# Altium PCB PowerSupply2.PCBDOC
Units mm, origin at the board's own origin, x right, y up, seen from the top; angles counter-clockwise.
Board outline 72.77 x 23.11 mm, 2 copper layers (Top Layer, Bottom Layer); 7 components, 4 nets, 22 pads, 2 vias.
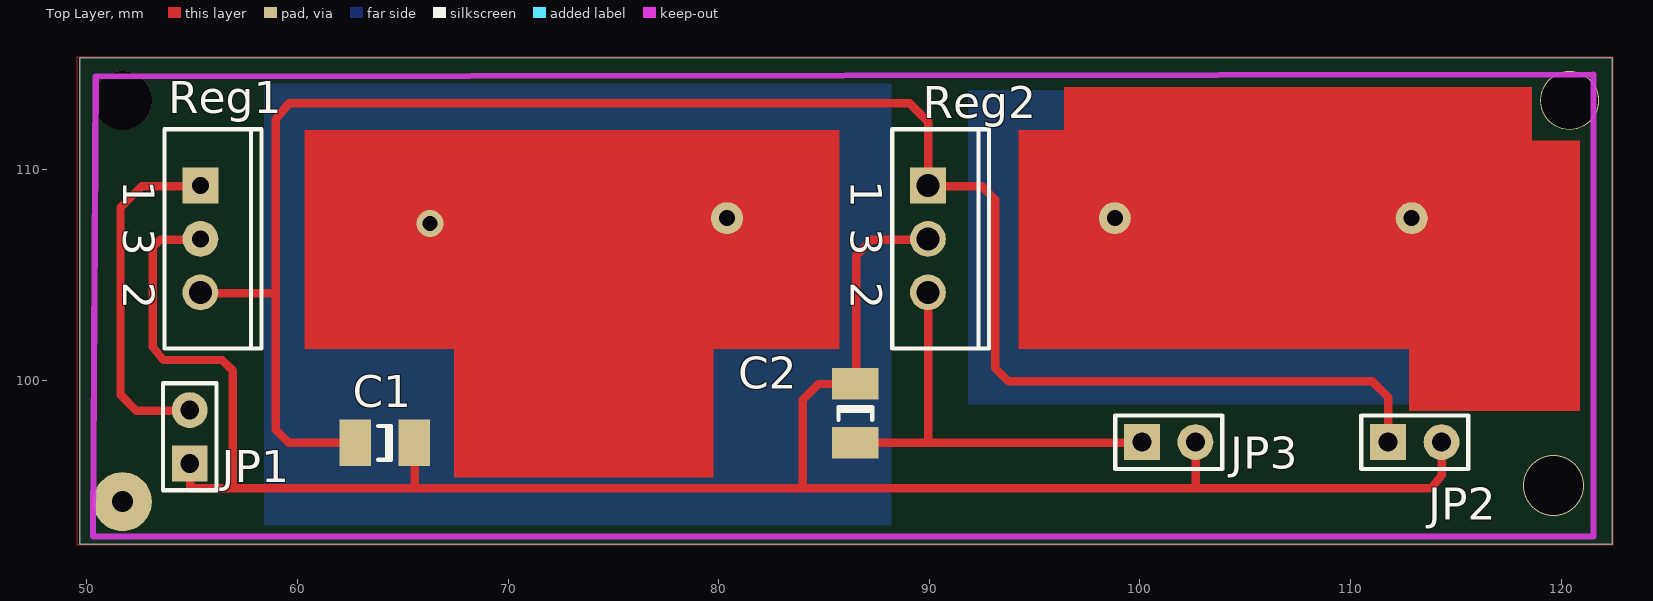
[diagram p0: Top Layer view]
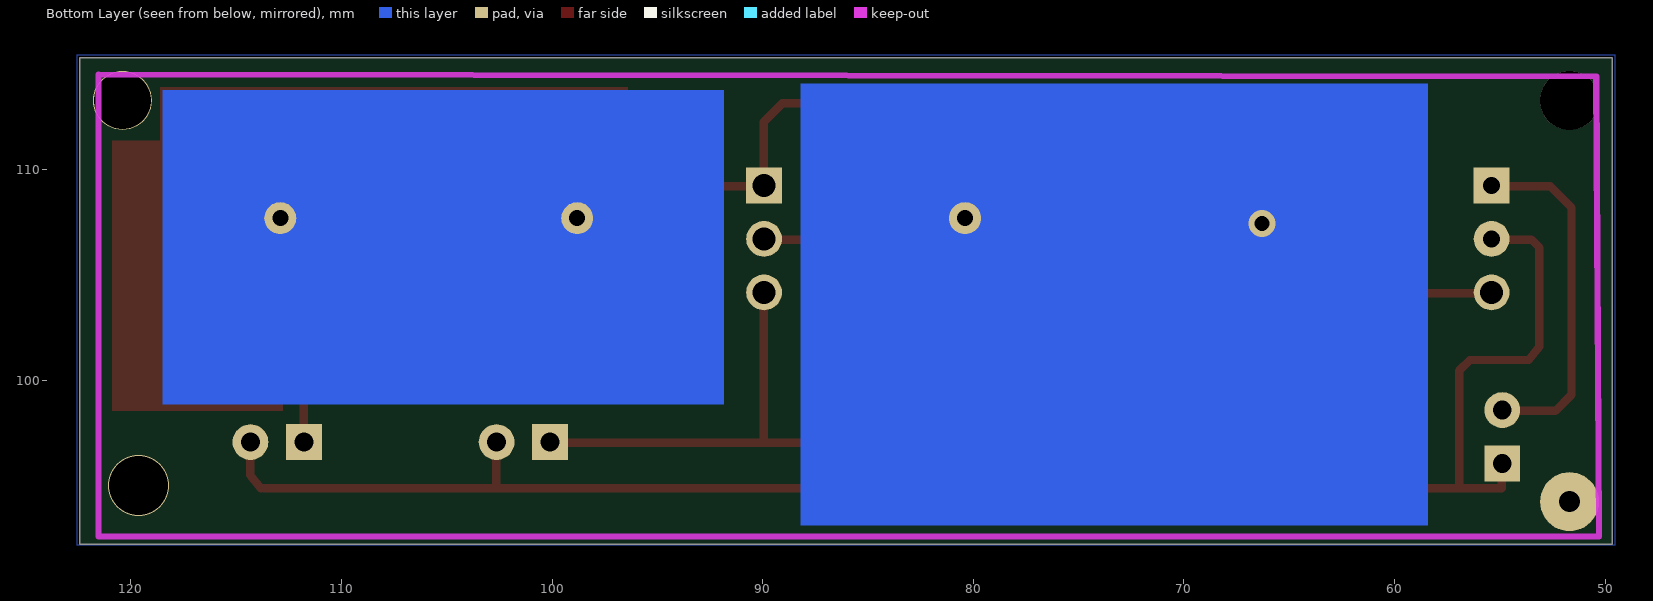
[diagram p1: Bottom Layer view, seen from below]

## Layer stack, top to bottom
Top Layer: signal copper 0.0356
Dielectric: dielectric 0.32, FR-4, Dk 4.8
Bottom Layer: signal copper 0.0356

## Board outline
49.657,115.316 122.428,115.316 122.428,92.202 49.657,92.202

## Design rules (kind name [scope] priority, off if disabled: settings)
Clearance [All] p1: gap=0.254
ComponentClearance [All] p1: gap=0.254 collisioncheckmode=0
HoleSize [All] p1: absolutevalues=TRUE maxlimit=3.1 minlimit=0.025 maxpercent=80.000 minpercent=20.000
PolygonConnect [All] p1: connectstyle=Relief reliefconductorwidth=0.254 reliefentries=4 polygonreliefangle="90 Angle"
RoomDefinition PowerSupply2 [InComponentClass('PowerSupply2')] p1: confinementstyle=ConfineIn formatcopy=TRUE outline 48.945,90.402 123.976,90.447 123.976,115.937 49.035,115.847
RoutingLayers [All] p1: top layer="Not Used" bottom layer="Not Used"
RoutingVias [All] p1: holewidth=0.711 width=1.27 viastyle="Through Hole" minholewidth=0.711 minwidth=1.27 maxholewidth=3 maxwidth=3.1
SolderMaskExpansion [All] p1: expansion=0.102
TestPointUsage [All] p1: valid=0 allowmultiple=FALSE
Testpoint [All] p1: side=15 testpointundercomponent=TRUE minsize=1.016 maxsize=2.54 preferedsize=1.524 minholesize=0 maxholesize=1.016 preferedholesize=0.813 testpointgrid=0.025 style=1023 order=1234567890
Width [All] p1: maxlimit=0.4 minlimit=0.254 preferedwidth=0.254
15 further rules are at their usual default settings.

## Components (designator, comment, footprint, x,y, rotation, side; value= is the part's Value field where it differs from the comment)
C1 "Cap Semi" CC3216-1206 66.566,97.062 r180 top
C2 "Cap Semi" CC3216-1206 86.378,97.062 r0 top
JP1 "Header 2" HDR1X2 54.882,96.046 r90 top
JP2 "Header 2" HDR1X2 111.778,97.062 r0 top
JP3 "Header 2" HDR1X2 100.094,97.062 r0 top
Reg1 "L78M05ABV" TO220V#1 55.39,106.714 r270 top
Reg2 "L78M05ABV" TO220V#2 89.934,106.714 r270 top

## Footprints (in the part's own frame and the unit in brackets; to place one, negate y for a bottom-side part, rotate by r counter-clockwise, add the part's x,y. Pads: shape width x height; smd on the part's side, far side on the other; paste and mask are expansions set on the pad)
CC3216-1206 [mm] "Chip Capacitor; Body 3.2 x 1.6 mm (LxW typ)"
HDR1X2 [mm] "Connector; Header; 2 Position"
  rect 1.7x1.7 hole 0.9: 1(0,0)
  round 1.7 hole 0.9: 2(2.54,0)
  silkscreen extent -1.27,-1.27 3.81,1.27
TO220V#1 [mm] "TO, Thru-Hole, Vertical, Heatsink Mounted; 3 In-Line Leads; Pitch 2.54 mm; Pin sequence 1, 3, 2"
  rect 1.7x1.7 hole 0.8: 1(-2.54,0)
  round 1.7 hole 1.1: 2(2.54,0)
  round 1.7 hole 0.8: 3(0,0)
  silkscreen extent -5.2,-1.7 5.2,2.9
TO220V#2 [mm] "TO, Thru-Hole, Vertical, Heatsink Mounted; 3 In-Line Leads; Pitch 2.54 mm; Pin sequence 1, 3, 2"
  rect 1.7x1.7 hole 1.1: 1(-2.54,0)
  round 1.7 hole 1.1: 2(2.54,0) 3(0,0)
  silkscreen extent -5.2,-1.7 5.2,2.9

## Part data
C1 C2: library part Cap, "Capacitor"
JP1 JP2 JP3: "Header, 2-Pin"
Reg1 Reg2: "Precision 500mA Regulator"

## Free pads (board coordinates)
  rect 1.5x2.2 smd: 1(65.535,97.028) 2(62.735,97.028)
  rect 2.2x1.5 smd: 1(86.487,99.825) 2(86.487,97.025)
  round 2.8 hole 2.7: 1(120.396,113.284)
  round 2.8 hole 2.8: 2(51.689,113.284)
  round 2.8 hole 1: 3(51.689,94.234)
  round 1.524 hole 0.762: 4(80.391,107.696) 5(98.806,107.696) 6(112.903,107.696)

## Via types
v1: diameter 1.27, hole 0.711, Top Layer to Bottom Layer, 1 vias
v2: diameter 2.9, hole 2.8, Top Layer to Bottom Layer, 1 vias

## Nets (pads, with @x,y where several pads share a name; then routed paths per layer and width w, separated by ;. In a path a pad name is that pad's centre, name@x,y a point inside that pad or via, vN(x,y) a via of type N, cw(c..) or ccw(c..) an arc to the next point about the centre after c; other vN are vias at no path point)
NetC1_1: JP1.1 JP2.2 JP3.2 pad.1@65.535,97.028 pad.1@86.487,99.825 Reg1.3 Reg2.3 | length 100.4
  Top Layer w0.4: 54.897,94.865 113.698,94.865 ; 54.897,94.992 JP1.1@54.897,96.008 ; Reg1.3@55.405,106.676 53.5,106.676 53.119,106.295 53.119,101.596 53.627,100.961 56.421,100.961 56.929,100.453 56.929,94.865 ; 65.565,94.865 pad.1@65.565,97.024 ; 83.98,94.865 83.98,99.056 84.745,99.821 86.52,99.821 86.52,105.914 87.282,106.676 Reg2.3@89.949,106.676 ; 102.649,94.865 JP3.2@102.649,97.024 ; 113.825,94.865 114.333,95.5 JP2.2@114.333,97.024
NetC1_2: JP2.1 pad.2@62.735,97.028 Reg1.2 Reg2.1 | length 90
  Top Layer w0.4: Reg1.2@55.405,104.136 58.961,104.136 ; pad.2@62.771,97.024 59.596,97.024 58.961,97.659 58.961,112.391 59.596,113.153 89.06,113.153 89.949,112.264 89.949,109.216 92.489,109.216 93.124,108.581 93.124,100.58 93.759,99.945 111.031,99.945 111.793,99.183 JP2.1@111.793,97.024
NetC2_2: JP3.1 pad.2@86.487,97.025 Reg2.2 | length 20.7
  Top Layer w0.4: pad.2@86.523,97.024 JP3.1@100.109,97.024 ; 89.949,97.024 Reg2.2@89.949,104.136
NetJP1_2: JP1.2 Reg1.1 | length 16.7
  Top Layer w0.4: JP1.2@54.897,98.548 52.357,98.548 51.595,99.31 51.595,108.2 52.611,109.216 Reg1.1@55.405,109.216
copper on no net:
  other v1: 66.294,107.442
  other v2: 119.634,94.996

## Polygon pours and split planes (outlines as drawn)
NetC1_1 on Top Layer (hatched 90Degree grid 0.508 track 0.203, remove dead copper): 49.541,115.356 122.459,115.356 122.459,92.159 49.541,92.159
NetC1_1 on Bottom Layer (hatched 90Degree grid 0.508 track 0.203, remove dead copper): 49.541,115.356 49.541,92.159 122.549,92.159 122.549,115.446 49.541,115.446

## Keep-outs
Keep-Out Layer:
  lines w0.3: 50.292,92.583 121.539,92.583 121.532,114.519 50.419,114.427 50.292,92.583

## Other copper
Top Layer:
  rectangle: 94.234,101.473 118.618,111.887
  rectangle: 60.325,101.473 85.725,111.887
  rectangle: 67.437,95.377 79.756,102.362
  rectangle: 96.393,111.379 118.618,113.919
  rectangle: 118.11,98.552 120.904,111.379
  rectangle: 112.776,98.552 118.999,103.251
Bottom Layer:
  rectangle: 91.845,98.858 118.491,113.792
  rectangle: 58.398,93.103 88.203,114.098

## Silkscreen, mask and mechanical layers (free items; w line width, h text height)
Top Overlay:
  lines w0.2: 63.835,96.228 64.435,96.228 64.435,97.828 63.835,97.828 ; 64.245,96.228 64.245,97.828 ; 85.687,98.125 85.687,98.725 87.287,98.725 87.287,98.125 ; 85.687,98.535 87.287,98.535

## Dimensions
50.292,92.583 to 121.539,92.583 on Mechanical 1
50.292,92.583 to 50.419,114.427 on Mechanical 1

## Text inside footprints (layer, text, board x,y; h text height)
Reg1: Top Overlay "1" at 51.715,109.504 h1.5 r270; Top Overlay "2" at 51.715,104.674 h1.5 r270; Top Overlay "3" at 51.715,107.214 h1.5 r270
Reg2: Top Overlay "3" at 86.259,107.214 h1.5 r270; Top Overlay "2" at 86.259,104.674 h1.5 r270; Top Overlay "1" at 86.259,109.504 h1.5 r270